# Altium PCB USB-C-SMD_HC-TYPE-C-6P-LT023A.pcbdoc
Units mil, origin at the board's own origin, x right, y up, seen from the top; angles counter-clockwise.
Board outline 895.67 x 649.7 mil, 2 copper layers (Top Layer, Bottom Layer); 1 components, 0 nets, 8 pads, 0 vias.
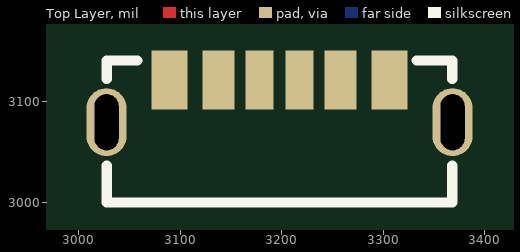
[diagram p0: Top Layer view]
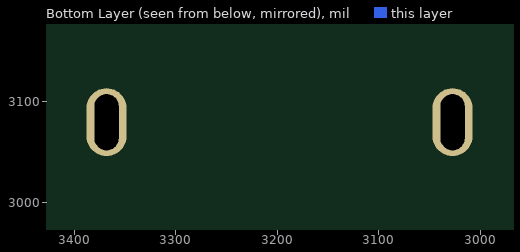
[diagram p1: Bottom Layer view, seen from below]

## Layer stack, top to bottom
Top Layer: signal copper (thickness not stored)
Dielectric: dielectric 12.6, FR-4, Dk 4.8
Bottom Layer: signal copper (thickness not stored)

## Board outline
3645.67,2750 2750,2750 2750,3399.7 3645.67,3399.7

## Components (designator, comment, footprint, x,y, rotation, side; value= is the part's Value field where it differs from the comment)
? "USB-C-SMD_HC-TYPE-C-6P-LT023A" USB-C-SMD_HC-TYPE-C-6P-LT023A 3197.84,3100 r0 top

## Footprints (in the part's own frame and the unit in brackets; to place one, negate y for a bottom-side part, rotate by r counter-clockwise, add the part's x,y. Pads: shape width x height; smd on the part's side, far side on the other; paste and mask are expansions set on the pad)
USB-C-SMD_HC-TYPE-C-6P-LT023A [mm]
  oval 1x1.7 hole 0.6 slot 1.4 at 90 deg: 1(-4.325,-0.527) 2(4.325,-0.527)
  rect 0.7x1.47 smd: A5(-0.5,0.527) B5(0.5,0.527)
  rect 0.8x1.47 smd: A9(1.52,0.527) B9(-1.52,0.527)
  rect 0.9x1.47 smd: A12(2.75,0.527) B12(-2.75,0.527)
  silkscreen extent -4.32,-2.54 4.32,1.02

## Nets (pads, with @x,y where several pads share a name; then routed paths per layer and width w, separated by ;. In a path a pad name is that pad's centre, name@x,y a point inside that pad or via, vN(x,y) a via of type N, cw(c..) or ccw(c..) an arc to the next point about the centre after c; other vN are vias at no path point)
pads on no net: ?.1 ?.2 ?.A5 ?.A9 ?.A12 ?.B5 ?.B9 ?.B12